# Altium PCB Kill_Switch_Testing.PcbDoc
Units mil, origin at the board's own origin, x right, y up, seen from the top; angles counter-clockwise.
Board outline 1480 x 630 mil, 2 copper layers (Top Layer, Bottom Layer); 13 components, 9 nets, 36 pads, 0 vias.
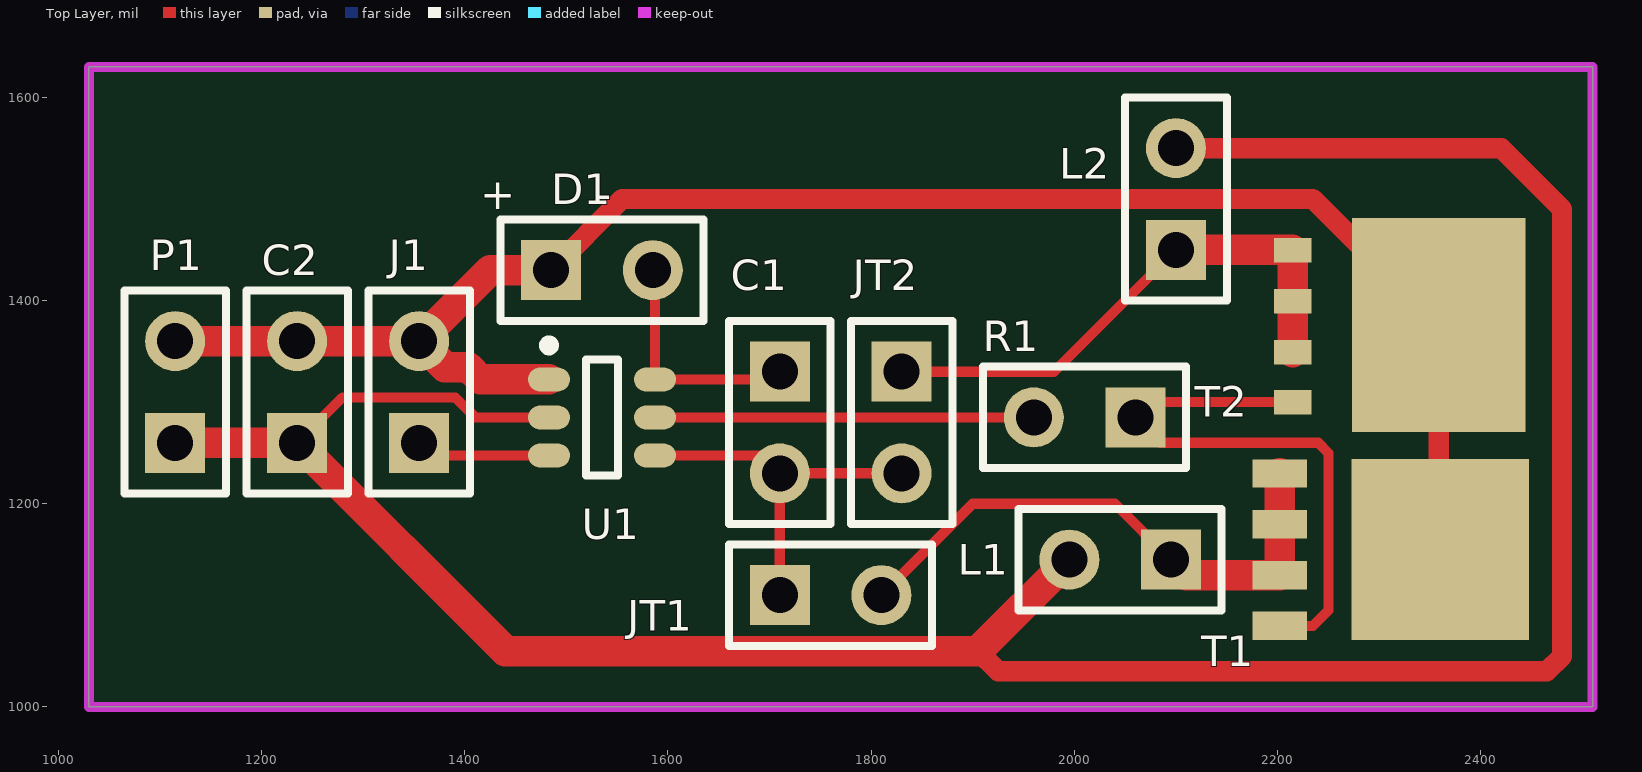
[diagram p0: Top Layer view]
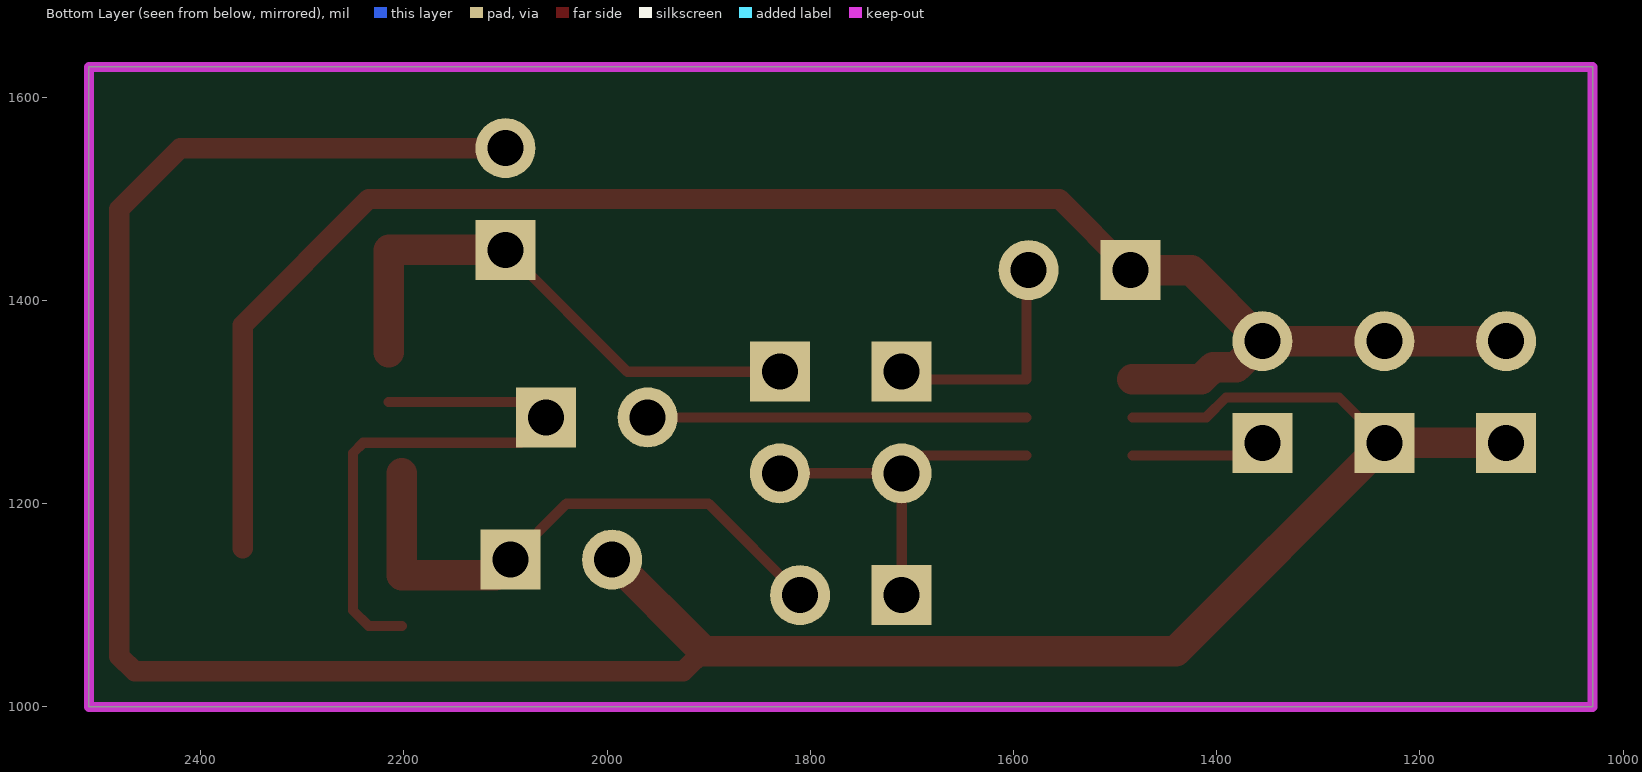
[diagram p1: Bottom Layer view, seen from below]

## Layer stack, top to bottom
Top Solder: solder mask 0.4, Solder Resist, Dk 3.5
Top Layer: signal copper 1.4
Dielectric 1: dielectric 12.6, FR-4, Dk 4.8
Bottom Layer: signal copper 1.4
Bottom Solder: solder mask 0.4, Solder Resist, Dk 3.5

## Board outline
1030,1000 2510,1000 2510,1630 1030,1630

## Design rules (kind name [scope] priority, off if disabled: settings)
Clearance [All] p1: gap=10 ignorepadtopadclearanceinfootprint=FALSE except(0: Arc-Hole Track-Hole SMDPad-Hole THPad-Hole Via-Hole Fill-Hole Poly-Hole Region-Hole Text-Hole)
PolygonConnect [All] p1: connectstyle=Relief reliefconductorwidth=10 reliefentries=4 polygonreliefangle="90 Angle" airgapwidth=10
RoutingVias [All] p1: holewidth=28 width=50 viastyle="Through Hole" minholewidth=28 minwidth=50 maxholewidth=28 maxwidth=50
SolderMaskExpansion [All] p1: expansion=4
Width [All] p1: maxlimit=30 minlimit=10 preferedwidth=10
30 further rules are at their usual default settings.

## Components (designator, comment, footprint, x,y, rotation, side; value= is the part's Value field where it differs from the comment)
C1 "Header 2" HDR1X2 1710,1330 r270 top
C2 "Header 2" HDR1X2 1235,1260 r90 top
D1 "Header 2" HDR1X2 1485,1430 r0 top
J1 "Header 2" HDR1X2 1355,1260 r90 top
JT1 "Header 2" HDR1X2 1710,1110 r0 top
JT2 "Header 2" HDR1X2 1830,1330 r270 top
L1 "Header 2" HDR1X2 2095,1145 r180 top
L2 "Header 2" HDR1X2 2100,1450 r90 top
P1 "Header 2" HDR1X2 1115,1260 r90 top
R1 "Header 2" HDR1X2 2060,1285 r180 top
T1 "CSD16570Q5B" CSD16570Q5B 2202.13,1229.8 r270 top
T2 "STL150N3LLH5" STL150N3LLH5 2215,1449.61 r270 top
U1 "IRS20752LPBF" IRS20752LPBF 1535,1285 r0 top

## Footprints (in the part's own frame and the unit in brackets; to place one, negate y for a bottom-side part, rotate by r counter-clockwise, add the part's x,y. Pads: shape width x height; smd on the part's side, far side on the other; paste and mask are expansions set on the pad)
CSD16570Q5B [mm] "25-V N-Channel NexFET™ Power MOSFET"
  rect 4.52x4.44 smd: D(1.9,4.01)
  rect 0.71x1.372 smd: G(3.81,0) S(0,0) S(1.27,0) S(2.54,0)
HDR1X2 [mm] "Connector; Header; 2 Position"
  rect 1.5x1.5 hole 0.9: 1(0,0)
  round 1.5 hole 0.9: 2(2.54,0)
  silkscreen extent -1.27,-1.27 3.81,1.27
IRS20752LPBF [mm] "SOT-23 High-Side Gate Driver IC"
  oval 1.05x0.6 smd: 1(-1.325,0.95) 2(-1.325,0) 3(-1.325,-0.95) 4(1.325,-0.95) 5(1.325,0) 6(1.325,0.95)
  silkscreen extent -1.45,-1.45 0.4,1.92, body extent -0.8,-1.45 0.8,1.45, height 1.45
STL150N3LLH5 [mm] "N-channel 30 V, 0.0014 ? typ., 35 A STripFET™ V Power MOSFET"
  rect 5.35x4.33 smd: D(1.875,3.65)
  rect 0.62x0.94 smd: G(3.8,0) S(0,0) S(1.275,0) S(2.55,0)

## Part data
C1 C2 D1 J1 JT1 JT2 L1 L2 P1 R1: "Header, 2-Pin", LatestRevisionDate=17-Jul-2002, LatestRevisionNote="Re-released for DXP Platform.", Publisher="Altium Limited"
T1: "25-V N-Channel NexFET™ Power MOSFET"
T2: "N-channel 30 V, 0.0014 ? typ., 35 A STripFET™ V Power MOSFET"
U1: "SOT-23 High-Side Gate Driver IC"

## Nets (pads, with @x,y where several pads share a name; then routed paths per layer and width w, separated by ;. In a path a pad name is that pad's centre, name@x,y a point inside that pad or via, vN(x,y) a via of type N, cw(c..) or ccw(c..) an arc to the next point about the centre after c; other vN are vias at no path point)
GND: C2.1 L1.2 L2.2 P1.1 U1.2 | length 2710.9
  Top Layer w10: C2.1 1279.53,1304.53 1390.74,1304.53 1410.27,1285 U1.2
  Top Layer w20: 1905,1055 1925,1035 2465,1035 2480,1050 2480,1490 2420,1550 L2.2
  Top Layer w30: P1.1 C2.1 1440,1055 1905,1055 L1.2
NetC1_1: C1.1 D1.2 U1.6 | length 234.5
  Top Layer w10: D1.2 1587.17,1427.83 U1.6 1702.4,1322.4 C1.1
NetC1_2: C1.2 JT1.1 JT2.2 U1.4 | length 370.1
  Top Layer w10: U1.4 1692.4,1247.6 C1.2 ; JT1.1 C1.2 ; JT2.2 C1.2
NetJ1_1: J1.1 U1.3 | length 133
  Top Layer w10: J1.1 1367.4,1247.6 U1.3
NetJT1_2: JT1.2 L1.1 T1.S | length 558.5
  Top Layer w10: JT1.2 1900,1200 2040,1200 L1.1 L1.1@2110.2,1129.8
  Top Layer w30: L1.1@2110.2,1129.8 2202.13,1129.8 2202.13,1179.8 T1.S@2202.13,1229.8
NetJT2_1: JT2.1 L2.1 T2.S | length 535.3
  Top Layer w10: JT2.1 1980,1330 L2.1 ; T2.S@2214.61,1450 T2.S@2215,1449.61
  Top Layer w30: L2.1 T2.S@2214.61,1450 ; T2.S@2215,1349.21 2215,1399.41 T2.S@2215,1449.61
NetR1_1: R1.1 T1.G T2.G | length 574.9
  Top Layer w10: T1.G 2234.8,1079.8 2250,1095 2250,1250 2240,1260 2085,1260 R1.1 2075,1300 T2.G
NetR1_2: R1.2 U1.5 | length 372.8
  Top Layer w10: U1.5 R1.2
VCC: C2.2 D1.1 J1.2 P1.2 T1.D T2.D U1.1 | length 1717.9
  Top Layer w10: T1.D@2358.7,1156.3 T1.D
  Top Layer w20: D1.1 1555,1500 2234.49,1500 T2.D T1.D@2358.7,1156.3
  Top Layer w30: P1.2 C2.2 J1.2 ; U1.1 1415.29,1322.4 1403.17,1334.53 1380.47,1334.53 J1.2 ; D1.1 1425,1430 J1.2

## Keep-outs
Keep-Out Layer:
  the board outline again, w10

## Silkscreen, mask and mechanical layers (free items; w line width, h text height)
Top Overlay:
  text "+      -" at 1415,1490 h30